# Altium PCB TD2_Project_TX.PcbDoc
Units mil, origin at the board's own origin, x right, y up, seen from the top; angles counter-clockwise.
Board outline 3941.96 x 3941.96 mil, 2 copper layers (Top Layer, Bottom Layer); 93 components, 80 nets, 381 pads, 128 vias.
Unrouted connection lines stored in the file: 3.
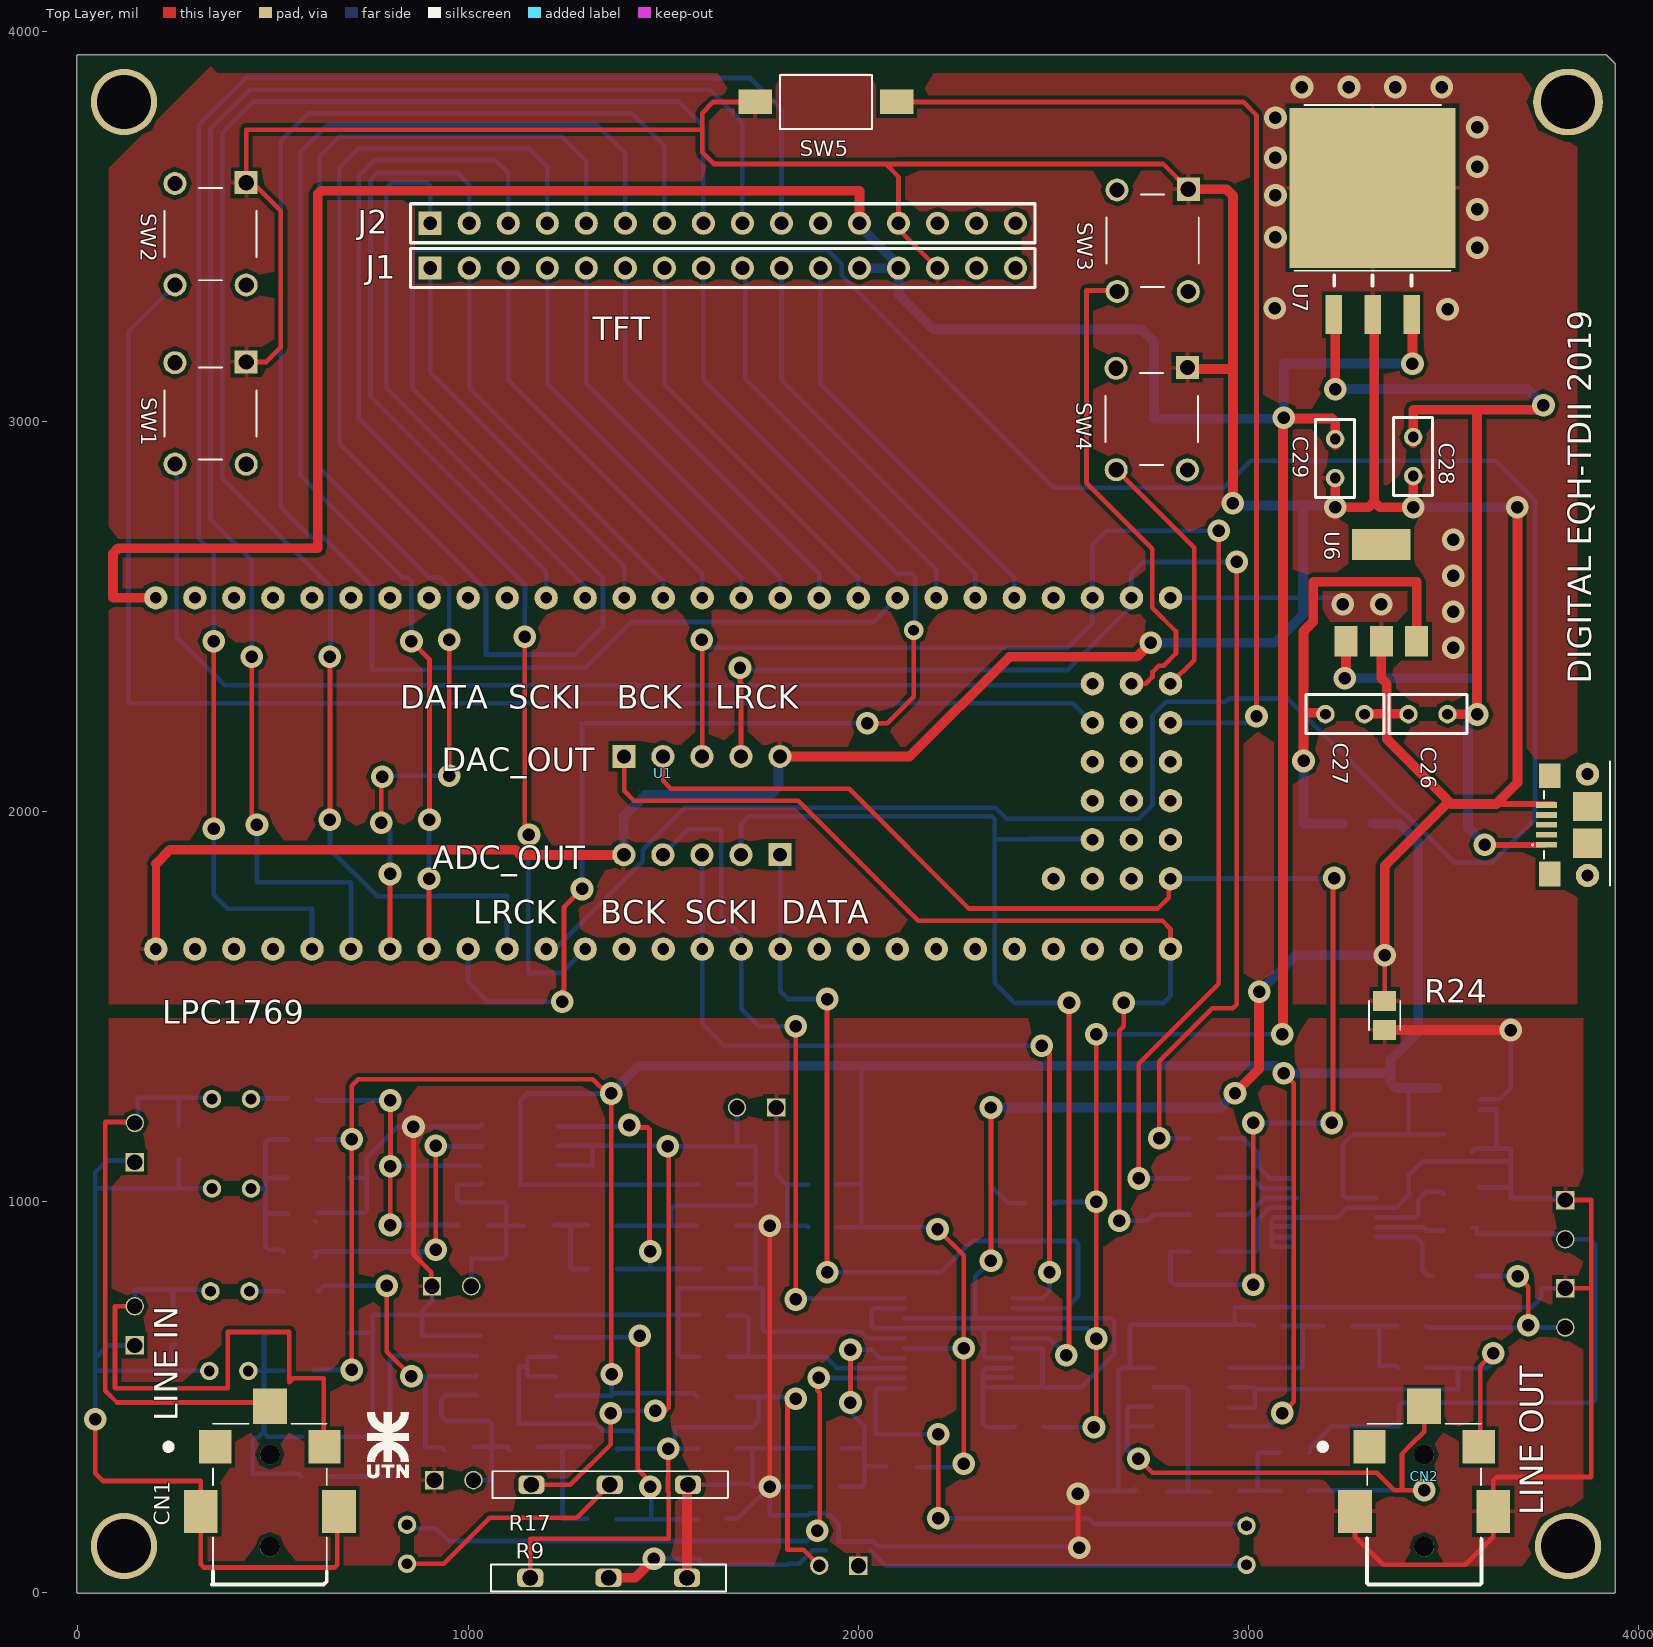
[diagram p0: Top Layer view]
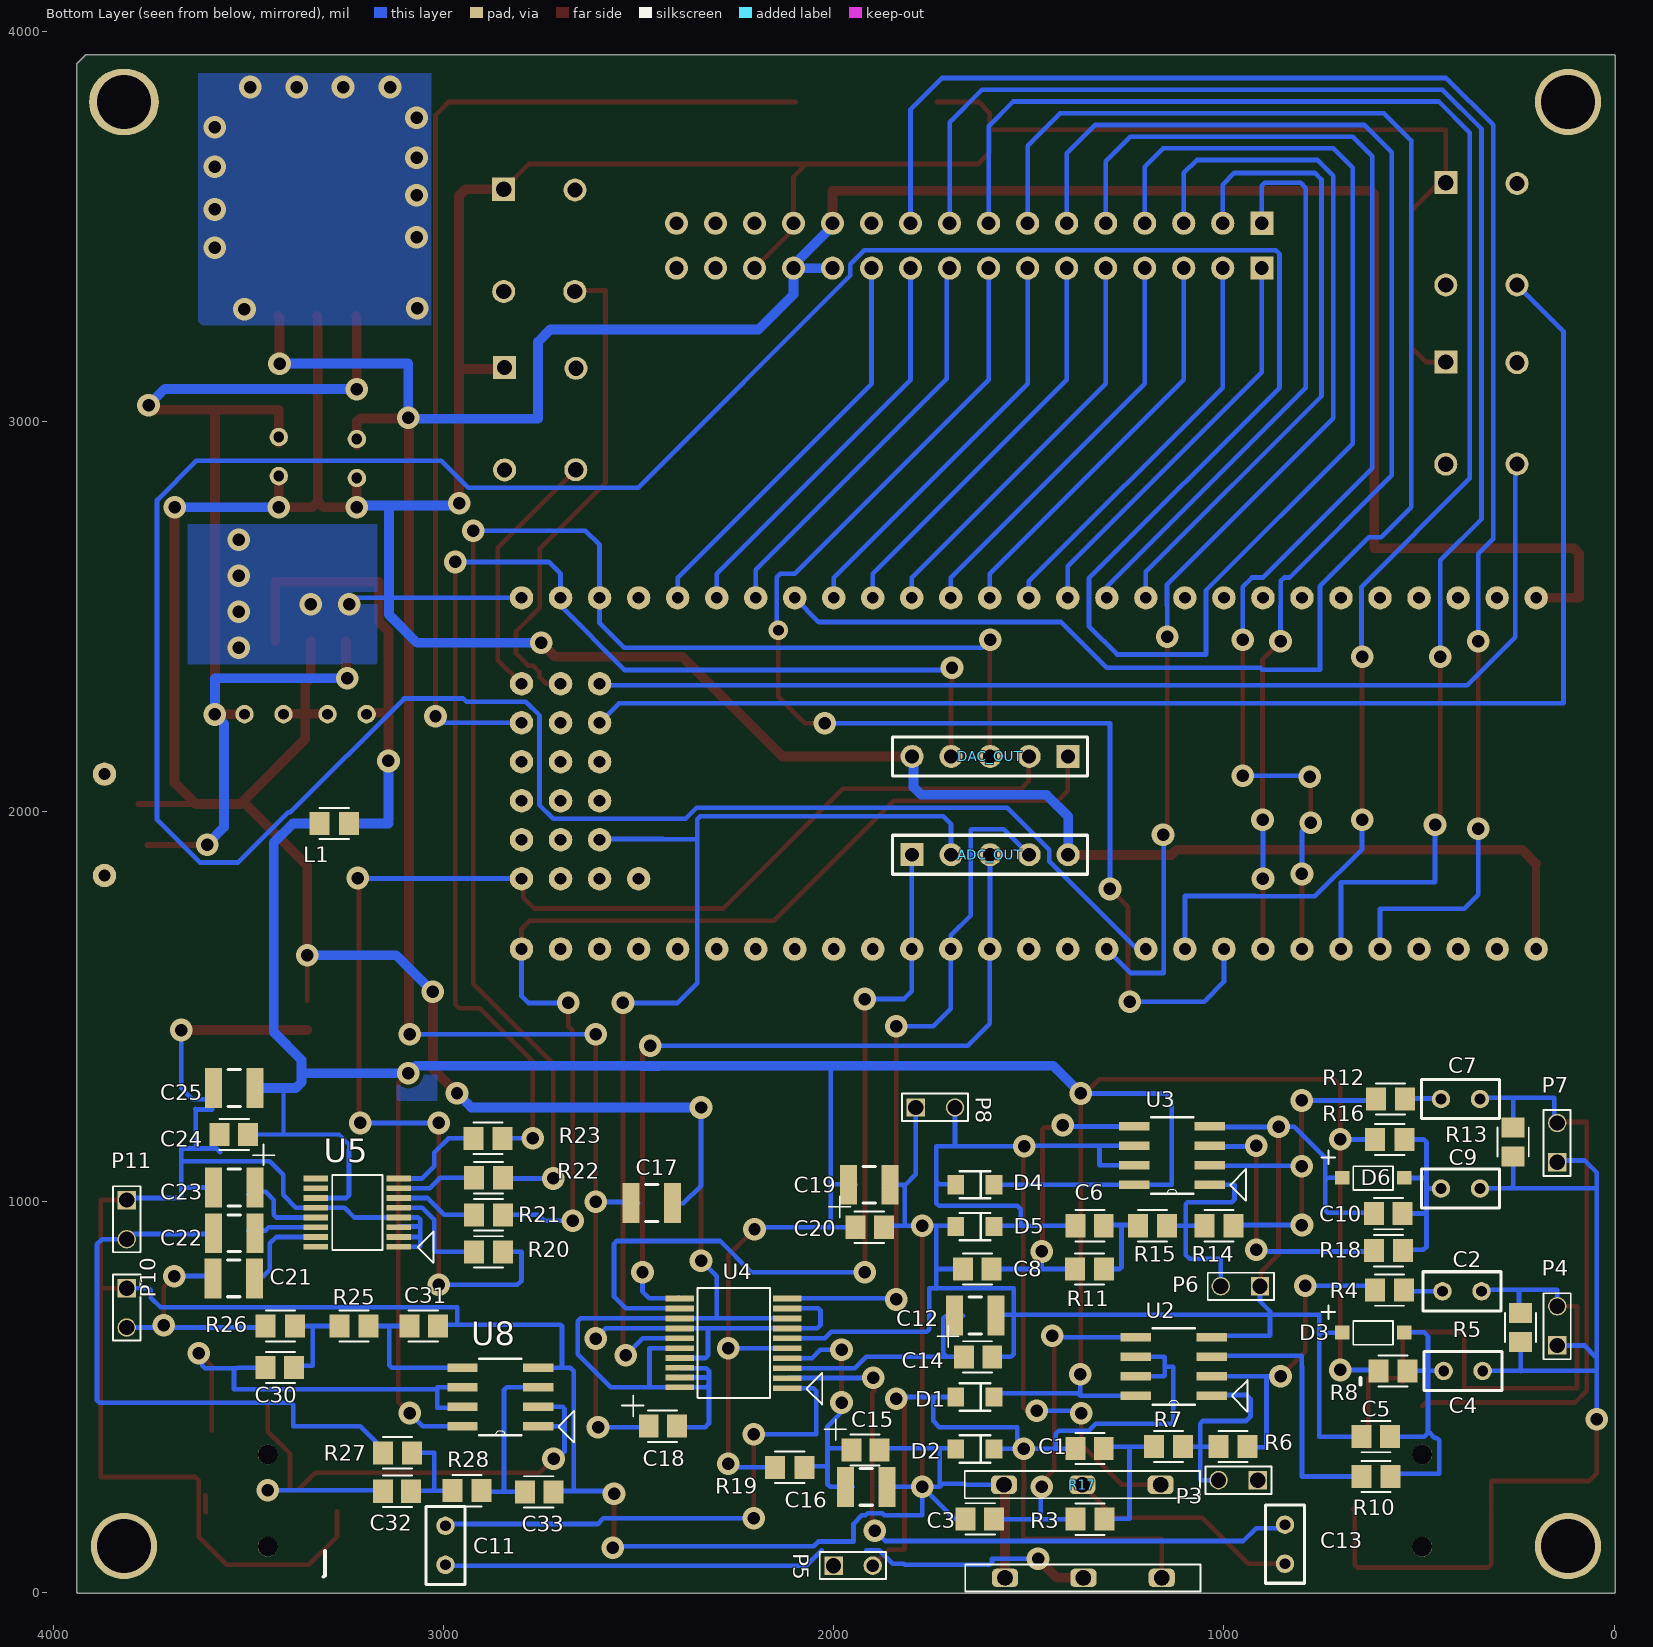
[diagram p1: Bottom Layer view, seen from below]

## Layer stack, top to bottom
Top Solder: solder mask 0.4, Solder Resist, Dk 3.5
Top Layer: signal copper 1.4
Dielectric 1: dielectric 12.6, FR-4, Dk 4.8
Bottom Layer: signal copper 1.4
Bottom Solder: solder mask 0.4, Solder Resist, Dk 3.5

## Board outline
-2.48,0 -2.48,3937.01 cw(c0,3937.01) 0,3939.48 3916.54,3939.48 cw(c3916.54,3937.01) 3918.29,3938.76 3918.28,3938.77 3938.77,3918.28 ccw(c3937.01,3916.54) 3938.75,3918.3 3938.76,3918.29 cw(c3937.01,3916.54) 3939.48,3916.54 3939.48,0 cw(c3937.01,0) 3937.01,-2.48 0,-2.48 cw(c0,0)

## Design rules (kind name [scope] priority, off if disabled: settings)
Clearance [All] p1: gap=10 ignorepadtopadclearanceinfootprint=FALSE
Height [All] p1: minheight=0 maxheight=1259 prefheight=500
PolygonConnect PolygonConnect_1 [All] p1: thpad.connectstyle=Relief thpad.reliefconductorwidth=10 thpad.reliefentries=4 thpad.polygonreliefangle="90 Angle" thpad.airgapwidth=10 smdpad.connectstyle=Relief smdpad.reliefconductorwidth=10 smdpad.reliefentries=4 smdpad.polygonreliefangle="90 Angle" smdpad.airgapwidth=10 via.connectstyle=Direct via.reliefconductorwidth=10 via.reliefentries=4 via.polygonreliefangle="90 Angle" via.airgapwidth=10
PolygonConnect [All] p2: connectstyle=Relief reliefconductorwidth=10 reliefentries=4 polygonreliefangle="90 Angle" airgapwidth=10
RoutingVias [All] p1: holewidth=32 width=58 viastyle="Through Hole" minholewidth=32 minwidth=58 maxholewidth=32 maxwidth=58
SolderMaskExpansion [All] p1: expansion=4
Width Width_1 [All] p1: maxlimit=25 minlimit=10 preferedwidth=12
29 further rules are at their usual default settings.

## Classes and differential pairs
component class U_ADC_PCM1802: ADC C11 C12 C13 C14 C15 C16 C17 C18 C19 C20 R19 U4
component class U_Battery: C26 C27 C28 C29 L1 U6 U7
component class U_DAC_PCM1781: C21 C22 C23 C24 C25 R20 R21 R22 R23 R24 U5
component class U_Input_Conditioning: C1 C2 C3 C4 C5 C6 C7 C8 C9 C10 CN1 D1 D2 D3 D4 D5 D6 P3 P4 P5 P6 P7 P8 R3 R4 R5 R6 R7 R8 R9 R10 R11 R12 R13 R14 R15 R16 R17 R18 U2 U3
component class U_Micro_M3: DAC_OUT SW1 SW2 SW3 SW4 SW5 U1
component class U_SALIDA_DAC: C30 C31 C32 C33 CN2 P10 P11 R25 R26 R27 R28 U8
component class U_TFT: J1 J2

## Components (designator, comment, footprint, x,y, rotation, side; value= is the part's Value field where it differs from the comment)
ADC_OUT "ADC_OUT" HDR1X5 1799.21,1889.76 r180 bottom
C1 "1000p" C_0805 1343,367.9 r0 bottom
C2 "10u" RAD-0.1 389.8,771.02 r180 bottom
C3 "470p" C_0805 1624.37,187.8 r0 bottom
C4 "10u" RAD-0.1 387,567 r0 bottom
C5 "220n" C_0805 610,398.54 r0 bottom
C6 "1000p" C_0805 1343,939 r0 bottom
C7 "10u" RAD-0.1 393.74,1263.52 r180 bottom
C8 "470p" C_0805 1631.1,828.25 r0 bottom
C9 "10u" RAD-0.1 393.74,1034.22 r0 bottom
C10 "220n" C_0805 578,970 r0 bottom
C11 "1uF" RAD-0.1 2995,120 r270 bottom
C12 "10uF" 14-1210 1637.03,708.72 r180 bottom
C13 "1uF" RAD-0.1 843.7,122.83 r270 bottom
C14 "0.1uF" C_0805_POL 1631.1,603 r180 bottom
C15 "0.1uF" C_0805_POL 1920,364 r180 bottom
C16 "10uF" 14-1210 1917,270 r180 bottom
C17 "10uF" 14-1210 2466,997.03 r180 bottom
C18 "0.1uF" C_0805_Pol 2439,425.3 r180 bottom
C19 "10uF" 14-1210 1909,1044 r180 bottom
C20 "0.1uF" C_0805_POL 1909,935.15 r180 bottom
C21 "10-uF Electrolytic" 14-1210 3537.8,804.33 r0 bottom
C22 "10-uF Electrolytic" 14-1210 3536.22,919.69 r0 bottom
C23 "10-uF Electrolytic" 14-1210 3536.22,1037 r0 bottom
C24 "0,1-uF Ceramic" C_0805_POL 3536.22,1173 r0 bottom
C25 "10-uF Electrolytic" 14-1210 3536.22,1292 r0 bottom
C26 "1 µF (X7R)" RAD-0.1 3460,2250 r180 top
C27 "1µF" RAD-0.1 3247,2250 r0 top
C28 "10 µF (X7R)" RAD-0.1 3422,2910 r270 top
C29 "10 µF (X7R)" RAD-0.1 3222,2905 r270 top
C30 "1000p" C_0805 3418.11,575.71 r0 bottom
C31 "470p" C_0805 3051.97,682.01 r180 bottom
C32 "1000p" C_0805 3118.11,258.62 r0 bottom
C33 "470p" C_0805 2755.91,257.05 r180 bottom
CN1 "Jack_3.5mm" JACK_3.5MM 492.13,215 r90 top locked
CN2 "Jack_3.5mm" JACK_3.5MM 3450,215 r90 top
D1 "Diode" LED_0805 1638,500 r180 bottom
D2 "Diode" LED_0805 1638,367.05 r180 bottom
D3 "ZENNER" SOD123 697,665.15 r180 bottom locked
D4 "Diode" LED_0805 1638,1044 r180 bottom
D5 "Diode" LED_0805 1638,936.8 r180 bottom
D6 "ZENNER" SOD123 697,1062 r180 bottom locked
DAC_OUT "DAC_OUT" HDR1X5 1399.21,2141.73 r0 bottom
J1 "CON16" HDR1X16 903,3393 r0 top
J2 "CON16" HDR1X16 903,3508 r0 top
L1 "Inductor" R_0805 3280,1970 r0 bottom
P3 "Header 2" HEADER1X2#1 913.39,287.01 r90 bottom
P4 "Header 2" HEADER1X2#1 145.71,632.2 r180 bottom
P5 "Header 2" HEADER1X2#2 2000.39,68 r270 bottom
P6 "Header 2" HEADER1X2#1 907.61,784 r90 bottom
P7 "Header 2" HEADER1X2#1 146,1102 r180 bottom
P8 "Header 2" HEADER1X2#1 1789.61,1242 r270 bottom
P10 "Header 2" HEADER1X2#1 3811.81,778.46 r0 bottom
P11 "Header 2" HEADER1X2#1 3811.81,1004.84 r0 bottom
R3 "8.2K" R_0805 1343,187.01 r0 bottom
R4 "4.7K" R_0805 576,774 r180 bottom
R5 "10K" R_0805 239.76,678.07 r90 bottom
R6 "15K" R_0805 977,373 r0 bottom
R7 "13K" R_0805 1142,373 r0 bottom
R8 "180" R_0805 567,567 r0 bottom
R9 "POTENCIOMETRO" POTENCIOMETRO 1360.24,36.61 r90 top
R10 "4.7K" R_0805 610,296.18 r0 bottom
R11 "8.2K" R_0805 1344.81,828.25 r0 bottom
R12 "4.7K" R_0805 572.83,1263.52 r180 bottom
R13 "10K" R_0805 258.9,1153.46 r90 bottom
R14 "15K" R_0805 1013,939 r0 bottom
R15 "13K" R_0805 1183,939 r0 bottom
R16 "180" R_0805 575,1160.22 r0 bottom
R17 "POTENCIOMETRO" POTENCIOMETRO 1362.99,275.2 r270 bottom
R18 "4.7K" R_0805 578,875 r0 bottom
R19 "1K 5%" R_0805 2112.54,320 r180 bottom
R20 "100 5%" R_0805 2885,872 r0 bottom
R21 "100 5%" R_0805 2885,967 r0 bottom
R22 "100 5%" R_0805 2884.92,1062 r0 bottom
R23 "100 5%" R_0805 2886,1163 r0 bottom
R24 "1 5%" R_0805 3348.82,1477.95 r90 top
R25 "8.2K" R_0805 3229.13,682.01 r180 bottom
R26 "13K" R_0805 3418.11,682.01 r180 bottom
R27 "13K" R_0805 3118.11,357.05 r180 bottom
R28 "13K" R_0805 2940,260 r180 bottom
SW1 "PULSADOR" PULSADOR 340,3020.76 r270 top
SW2 "PULSADOR" PULSADOR 340,3480 r270 top
SW3 "PULSADOR" PULSADOR 2754.39,3463.25 r270 top
SW4 "PULSADOR" PULSADOR 2751.97,3006.3 r270 top
SW5 "PULSADOR" SW_SMD(2) 1917,3818.9 r0 top
U1 "LPCEXPRESSO1769" LPCEXPRESSO1769 1400,2108 r90 top locked
U2 "OPA2337" SOIC-8N 1128.5,578.44 r0 bottom
U3 "OPA2337" SOIC-8N 1133,1119 r0 bottom
U4 "ADC_PCM1802" "SSOP (20)" 2118.74,522.56 r0 bottom
U5 "DAC_PCM1781" "SSOP (16)" 3114.96,885.15 r0 bottom
U6 "MCP1703" SOT-223-3 3340.35,2560.87 r0 top locked
U7 "MIC29300" TO-263-3 3318.11,3273.82 r0 top
U8 "OPA2337" SOIC-8N 2854.33,500 r0 bottom

## Footprints (in the part's own frame and the unit in brackets; to place one, negate y for a bottom-side part, rotate by r counter-clockwise, add the part's x,y. Pads: shape width x height; smd on the part's side, far side on the other; paste and mask are expansions set on the pad)
14-1210 [mm] "Chip Resistor, Body 3.2x2.5mm, IPC High Density"
  rect 1.1x2.6 smd: 1(-1.35,0) 2(1.35,0)
  silkscreen extent -0.4,-1.2 0.4,1.2, body extent -1.68,-1.32 1.68,1.32, height 0.9
C_0805 [mm] "Capacitor SMD"
  rect 1.3x1.5 smd: 1(-0.889,0) 2(0.95,0)
  silkscreen extent -0.95,-1.02 0.95,1.02, body extent -1,-0.62 1,0.63, height 0.78
C_0805_POL [mm] "CAPACITOR_POLARYSED"
  rect 1.3x1.5 smd: 1(-0.889,0) 2(0.95,0)
  silkscreen extent -2.63,-1.02 0.95,2.02, body extent -1,-0.62 1,0.63, height 0.78
C_0805_Pol [mm] "CAPACITOR_POLARYSED"
  rect 1.3x1.5 smd: 1(-0.889,0) 2(0.95,0)
  silkscreen extent -2.63,-1.02 0.95,2.02, body extent -1,-0.62 1,0.63, height 0.78
HDR1X5 [mm] "Connector; Header; 5 Position"
  rect 1.5x1.5 hole 0.9: 1(0,0)
  round 1.5 hole 0.9: 2(2.54,0) 3(5.08,0) 4(7.62,0) 5(10.16,0)
  silkscreen extent -1.27,-1.27 11.43,1.27
HDR1X16 [mm] "Connector; Header; 16 Position"
  rect 1.5x1.5 hole 0.9: 1(0,0)
  round 1.5 hole 0.9: 2(2.54,0) 3(5.08,0) 4(7.62,0) 5(10.16,0) 6(12.7,0) 7(15.24,0) 8(17.78,0) 9(20.32,0) 10(22.86,0) 11(25.4,0) 12(27.94,0) 13(30.48,0) 14(33.02,0) 15(35.56,0) 16(38.1,0)
  silkscreen extent -1.27,-1.27 39.37,1.27
HEADER1X2#1 [mm]
  rect 1.2x1.2 hole 1: 1(0,0)
  round 1.2 hole 1: 2(0,2.55)
  silkscreen extent -0.9,-0.9 0.88,3.4, body extent -1.27,-1.31 1.27,3.77, height 8.54
HEADER1X2#2 [mm]
  rect 1.2x1.2 hole 1: 1(0,0)
  round 1.2 hole 0.8: 2(0,2.55)
  silkscreen extent -0.9,-0.9 0.88,3.4, body extent -1.27,-1.31 1.27,3.77, height 8.54
JACK_3.5MM [mm] "*CUI_SJ2-35944A-SMT-TR_SJ2-35944A-SMT-TR(Primary)"
  rect 2.2x2.1 smd: 1(4,3.55) 2(4,-3.55)
  rect 2.3x2.2 smd: 3(6.65,0)
  rect 2.8x2.2 smd: 4(-0.2,4.5) 5(-0.2,-4.5)
  round 1.3 hole 1.3 unplated: None(-2.5,0) None(3.5,0)
  silkscreen extent -4.1,-3.7 5.5,6.8, body extent -8.35,-5.11 7.35,4.89, height 6.56
LED_0805 [mm]
  rect 1.1x1.25 smd: 1(-1.25,0) 2(1.25,0)
  silkscreen extent -1,-0.89 1,0.89, body extent -1.02,-0.46 1.04,0.45, height 0.85
LPCEXPRESSO1769 [mil]
  round 60 hole 30: 1(-460,1200) 2(-460,1100) 3(-460,1000) 4(-460,900) 5(-460,800) 6(-460,700) 7(-460,600) 8(-460,500) 9(-460,400) 10(-460,300) 11(-460,200) 12(-460,100) 13(-460,0) 14(-460,-100) 15(-460,-200) 16(-460,-300) 17(-460,-400) 18(-460,-500) 19(-460,-600) 20(-460,-700) 21(-460,-800) 22(-460,-900) 23(-460,-1000) 24(-460,-1100) 25(-460,-1200) 26(-460,-1300) 27(-460,-1400) 28(440,1200) 29(440,1100) 30(440,1000) 31(440,900) 32(440,800) 33(440,700) 34(440,600) 35(440,500) 36(440,400) 37(440,300) 38(440,200) 39(440,100) 40(440,0) 41(440,-100) 42(440,-200) 43(440,-300) 44(440,-400) 45(440,-500) 46(440,-600) 47(440,-700) 48(440,-800) 49(440,-900) 50(440,-1000) 51(440,-1100) 52(440,-1200) 53(440,-1300) 54(440,-1400) 55(-280,-1100) 56(-280,-1200) 57(-180,-1200) 58(-80,-1200) 59(20,-1200) 60(120,-1200) 61(220,-1200) 62(-280,-1300) 63(-180,-1300) 64(-80,-1300) 65(20,-1300) 66(120,-1300) 67(220,-1300) 68(-280,-1400) 69(-180,-1400) 70(-80,-1400) 71(20,-1400) 72(120,-1400) 73(220,-1400)
  body extent -737,-1484 613,2597, height 706
POTENCIOMETRO [mm]
  rrect50% 1.2x1.7 hole 1: 1(0,-5.1) 2(0,0) 3(0,5.1)
  silkscreen extent -0.9,-7.65 0.88,7.65
PULSADOR [mm] "TE_3-1825910-1"
  rect 1.498x1.498 hole 0.99: 1(-3.35,2.32)
  round 1.498 hole 0.99: 2(3.3,-2.31) 3(-3.3,-2.32) 4(3.31,2.32)
  silkscreen extent -3,-3 3,3, body extent -3.9,-2.99 3.9,3, height 17.5
R_0805 [mm] "Resistor SMD"
  rect 1.3x1.5 smd: 1(-0.95,0) 2(0.95,0)
  silkscreen extent -0.95,-1.02 0.95,1.02, body extent -1.05,-0.63 0.95,0.62, height 0.78
RAD-0.1 [mm] "Radial Cap, Thru-Hole; 2 Leads; 0.1 in Pin Spacing"
  round 1.2 hole 0.7: 1(-1.27,0) 2(1.27,0)
  silkscreen extent -2.54,-1.27 2.54,1.27
SOD123 [mm]
  rect 0.95x0.9 smd: 1(0,0) 2(4.05,0)
  silkscreen extent -1.34,-0.79 3.32,1.78
SOIC-8N [mil] "LM358"
  rect 78x22 smd: 1(-97,75) 2(-97,25) 3(-97,-25) 4(-97,-75) 5(97,-75) 6(97,-25) 7(97,25) 8(97,75)
  silkscreen extent -189,-98 54,116, body extent -119,-96 118,97, height 64
SOT-223-3 [mm] "MCP1703 / LM1117"
  rect 1.5x2 smd: 1(-2.3,-3.15) 2(0,-3.15) 3(2.3,-3.15)
  rect 3.8x2 smd: 4(0,3.15)
  body extent -3.23,-3.62 3.27,3.38, height 1.68
"SSOP (16)" [mm] "DAC_PCM1781"
  rect 1.6x0.381 smd: 1(0,0) 2(0,-0.635) 3(0,-1.27) 4(0,-1.905) 5(0,-2.54) 6(0,-3.175) 7(0,-3.81) 8(0,-4.445) 9(5.4,-4.445) 10(5.4,-3.81) 11(5.4,-3.175) 12(5.4,-2.54) 13(5.4,-1.905) 14(5.4,-1.27) 15(5.4,-0.635) 16(5.4,0)
  silkscreen extent -2.27,-4.66 4.32,1.05, body extent -0.4,-4.67 5.62,0.23, height 1.62
"SSOP (20)" [mm] "ADC_PCM1802"
  rect 1.85x0.381 smd: 1(0,0) 1(0,0) 2(0,-0.65) 3(0,-1.3) 4(0,-1.95) 5(0,-2.6) 6(0,-3.25) 7(0,-3.9) 8(0,-4.55) 9(0,-5.2) 10(0,-5.85) 11(7,-5.85) 12(7,-5.2) 13(7,-4.55) 14(7,-3.9) 15(7,-3.25) 16(7,-2.6) 17(7,-1.965) 18(7,-1.33) 19(7,-0.695) 20(7,-0.06)
  silkscreen extent -2.27,-6.53 5.84,1.05, body extent -0.44,-6.55 7.36,0.65, height 1.9
SW_SMD(2) [mm] "SW_1437566-3"
  rect 2.18x1.6 smd: 1(-4.6,0) 2(4.6,0)
  silkscreen extent -3,-1.75 3,1.75, body extent -5.08,-1.7 4.88,1.8, height 4.4
TO-263-3 [mil] "MIC29300"
  rect 42x100 smd: 1(-100,0) 2(0,0) 3(100,0)
  rect 425x410 smd: GND(0,325)
  silkscreen extent -200,75 200,538, body extent -211,-18 209,547

## Part data
ADC_OUT DAC_OUT: library part "Header 5", "Header, 5-Pin", LatestRevisionDate=17-Jul-2002, LatestRevisionNote="Re-released for DXP Platform.", Publisher="Altium Limited"
C1 C2 C3 C4 C5 C6 C7 C8 C9 C10 C30 C31 C32 C33: library part Capacitor_NP, "Non Polarised Capacitor"
C11 C12 C13 C14 C15 C16 C17 C18 C19 C20 C21 C22 C23 C24 C25 C26 C27 C28 C29: library part Capacitor_Pol, "Polarysed Capacitor"
P3 P4 P5 P6 P7 P8 P10 P11: "Header, 2-Pin", LatestRevisionDate=17-Jul-2002, LatestRevisionNote="Re-released for DXP Platform.", Publisher="Altium Limited"
R3 R4 R5 R6 R7 R8 R10 R11 R12 R13 R14 R15 R16 R18 R19 R20 R21 R22 R23 R24 R25 R26 R27 R28: library part Resistor
U4: "The PCM1802 is a high-performance, low-cost, / single-chip stereo analog-to-digital converter with / single-ended analog voltage input. The PCM1802 / uses a delta-sigma modulator with 64-times or / 128-times oversampling, and includes a digital / decimation filter and high-pass filter (HPF), which / removes the DC component of the input signal. For / various applications, the PCM1802 supports master / and slave modes and four data formats in serial / interface. The PCM1802 is suitable for a wide variety / of cost-sensitive consumer applications where good / performance, 5-V analog supply, and 3.3-V digital / supply operation is required. The PCM1802 is / fabricated using a highly advanced CMOS process / and is available in the DB 20-pin SSOP package."
U5: "The PCM1780/81/82 is a CMOS, monolithic, integrated circuit, which includes stereo digital-to-analog converters and support circuitry in a small 16-lead SSOP package. The data converters use TI’s enhanced multilevel delta-sigma architecture to achieve excellent dynamic performance an improved tolerance to clock jitter. Sampling rates up to 200 kHz are supported."
U6 U7: "low dropout positive voltage regulators that / are capable of providing an output current that is in excess of 1.0 A / with a maximum dropout voltage of 1.2 V at 800 mA over / temperature. This series contains nine fixed output voltages of 1.5 V, / 1.8 V, 1.9 V, 2.0 V, 2.5 V, 2.85 V, 3.3 V, 5.0 V, and 12 V that have no / minimum load requirement to maintain regulation"

## Free pads (board coordinates)
  rect 53.15x15 smd: 1(3763.7,1915.24) 2(3763.7,1940.83) 3(3763.7,1966.42) 4(3763.7,1992.01) 5(3763.7,2017.6)
  rect 55.12x62.99 smd: 6(3772.56,2092.4) 7(3772.56,1840.43)
  rect 74.8x74.8 smd: 8(3869.02,1919.17) 9(3869.02,2013.66)
  round 60 hole 31.5: none(3868.7,1836.42) none(3868.7,2096.42)
  round 170 hole 137.8 unplated: ""(118.11,118.11) ""(118.11,3818.9) ""(3818.9,118.11)
  oval 179x170 hole 137.8 unplated: ""(3818.9,3818.9)

## Via types
v1: diameter 58, hole 32, Top Layer to Bottom Layer, tented both sides, 105 vias
v2: diameter 58, hole 32, Top Layer to Bottom Layer, 22 vias
v3: diameter 50, hole 28, Top Layer to Bottom Layer, 1 vias

## Nets (pads, with @x,y where several pads share a name; then routed paths per layer and width w, separated by ;. In a path a pad name is that pad's centre, name@x,y a point inside that pad or via, vN(x,y) a via of type N, cw(c..) or ccw(c..) an arc to the next point about the centre after c; other vN are vias at no path point)
3V3: C17.1 C18.1 C29.1 J1.12 J1.13 J2.12 U1.28 U4.7 U4.9 U4.14 U4.17 U7.3 | length 9661
  Top Layer w12: J1.13 J1.13@2103,3400.5 ; v1(2604,423) 2610,429 v1(2610,650) v1(2610,1000) v1(2610,1430) ; 3083.76,2230 3088.4,2234.65
  Top Layer w25: 90.16,2548.03 90.16,2661.81 103.54,2675.2 614.96,2675.2 614.96,3583.07 623.38,3591.49 2003,3591.49 J2.12 J2.12@2003,3500.5 ; 90.19,2548 U1.28 ; J1.13 J1.13@2104.06,3391.94 ; v1(3086.81,1430) 3088.4,1431.6 3088.4,2234.65 3088.4,3008.4 v1(3090,3010) 3092.05,3007.95 3214.05,3007.95 3222,3000 C29.1 C29.1@3222,2940 ; v1(3420.08,3148.43) 3420.08,3266.34 U7.3@3424.02,3270.28
  Bottom Layer w12: U4.9 2039.69,727.28 2034,721.6 2034,684 2041.9,676.1 U4.7 2319.72,676.1 ; U4.17 2329.03,599.92 2322,606.95 2322,673.82 2319.72,676.1 ; C18.1 2476.3,423 v1@2586,423 ; C17.1@2501,997.03 2502.97,999 2505.94,996.03 2509.91,1000 v1(2610,1000) ; v1(2610,650) 2583.9,676.1 U4.14 2319.72,676.1 ; v1(2610,1430) v1(3086.81,1430)
  Bottom Layer w25: J1.12 J1.13 ; J2.12 2003,3500.5 2103,3400.5 J1.13 ; v1(3420.08,3148.43) 3090,3148.43 v1(3090,3010) 3087.09,3007.09 2757.68,3007.09 2757.68,3204.13 2726.38,3235.43 2192.91,3235.43 2103,3325.35 J1.13
5V_ANALOG: C19.1 C20.1 C24.1 C25.1 D1.2 D4.2 L1.2 R8.2 R16.2 R19.1 U2.8 U3.8 U4.5 U5.11 U8.8 | length 9917.1
  Top Layer w12: v1(702,569.43) v1(702,1160.22) 702,1297.97 718.03,1314 1320,1314 1356,1278 v1(1366.5,1278) 1367.25,1277.25 1367.25,558.75 v1(1368,558) ; v1(2203,930) 2270,863 v1(2270,625) v1(2270,329) ; v1@3087,441 3087,458.85 v1(3086.81,459.04) 3115.86,488.09 3115.86,1304.14 v1(3090,1330)
  Bottom Layer w10: 3242,1133.97 3241.69,1134.29 3241.69,1147.66 3267.03,1173 3410,1173 ; 3410,1292 3410,1173 ; C24.1 3410,1173
  Bottom Layer w12: R8.2 606.83,569.43 v1(702,569.43) ; R16.2 v1(702,1160.22) ; U2.8 1368,503.44 ; v1(1366.5,1278) 1152,1278 1134,1260 1134,1044 U3.8 D4.2 ; v1(1368,558) 1368,503.44 ; D1.2 1578.79,510 1374.56,510 1368,503.44 ; C20.1 2000.84,935.15 ; C19.1@1944,1044 1945,1045 2006.87,1045 2007.87,1044 ; 2007.87,1343.7 2007.87,1044 ; U4.5 2118.78,624.96 v1(2270,625) v1(2270,625) ; R19.1 2270,320 v1(2270,329) ; v1(2203,930) 2197.85,935.15 2000.84,935.15 ; U8.8 3052.77,425 v1(3086.81,459.04) ; 3242,1133.97 3242,1017.18 3249.03,1010.15 U5.11 ; 2000.84,935.15 2007.87,942.18 2007.87,1044
  Bottom Layer w25: v1(1366.5,1278) 1437.71,1349.21 2447.96,1349.21 2448.67,1348.5 2491.33,1348.5 2492.04,1349.21 3070.79,1349.21 v1(3090,1330) 3364,1330 ; L1.2 3386,1970 3435,1921 3435,1435 3364,1364 3364,1330 ; C25.1 3410,1292 3378.64,1292 3364,1306.64 3364,1330
5V_DIGITAL: C27.1 L1.1 U6.3 | length 1191.1
  Top Layer w25: v1(3141,2130) 3141,2462.45 3165.95,2487.4 3165.95,2589.18 3430.9,2589.18 U6.3 ; 3151,2253.78 C27.1@3203.73,2253.78
  Bottom Layer w25: 3141,1970 L1.1 ; 3141,1980 v1(3141,2130)
+IN_B: C31.1 R25.2 U8.5 | length 395.8
  Bottom Layer w12: U8.5 2951.41,574.92 3132.32,574.92 3139.35,581.95 3139.35,682.01 ; C31.1 3139.35,682.01 ; R25.2 3139.35,682.01
+IN_B1: C3.1 R3.2 U2.5 | length 911.9
  Top Layer w12: v1(1440,657) 1434.53,651.53 1434.53,314.92 1467,282.45 v1(1467,270)
  Bottom Layer w12: U2.5 1436.44,653.44 v1(1440,657) ; R3.2 1469.29,187.01 ; v1(1467,270) 1469.29,267.71 1469.29,187.01 ; C3.1 1588.58,187.01 1469.29,187.01
+IN_B2: C8.1 R11.2 U3.5 | length 813.6
  Top Layer w12: v1(1413,1197) 1419.12,1190.88 1460,1190.88 1465,1185.88 1465,875 v1(1467,873)
  Bottom Layer w12: U3.5 1230.51,1193.49 1409.49,1193.49 v1(1413,1197) ; R11.2 1467,828.25 ; v1(1467,873) 1467,828.25 ; C8.1 1467,828.25
AGND: C3.2 C5.2 C8.2 C10.2 C12.2 C14.2 C15.2 C16.2 C19.2 C20.2 C23.2 C24.2 C25.2 C31.2 C33.2 CN2.4 CN2.5 D2.1 D3.1 D5.1 D6.1 P3.1 P5.1 P6.1 P8.1 P10.1 P11.1 R9.1 R17.1 R24.1 U2.4 U3.4 U4.6 U5.1 U5.2 U5.3 U5.4 U5.12 U8.4 | length 12920.5
  Top Layer w12: v1(860,1192.91) 860,865.6 906,819.6 P6.1@906,787 ; v1(1773,270) v1(1773,939) ; v1@2559.06,248.12 v1(2562.94,252) 2562.94,117.77 v1(2566.54,114.17) ; CN2.4 3272.83,142.17 3345,70 3555,70 3627.17,142.17 CN2.5 3627.17,286.17 3636,295 3877.95,295 3877.95,1004.84 P11.1 ; CN2.5@3610,205 CN2.5@3610,247.83 ; P10.1 3877.95,778.46
  Top Layer w25: R9.1 1561.02,272.44 R17.1 ; R24.1 v1(3672,1440.55)
  Bottom Layer w8: C33.2@2710.55,265 C33.2
  Bottom Layer w12: C10.2@606.4,952 C10.2@609.4,949 ; C10.2 617.4,972 733.7,972 740.73,979.03 740.73,1054.97 ; C5.2 756,398.54 756,665.15 ; D3.1 756,665.15 ; D6.1 733.7,1062 740.73,1054.97 ; v1@852.84,1185.76 v1(860,1192.91) 820.16,1192.91 740.73,1113.49 740.73,1054.97 ; v1@861,1192 1025,1192 1027,1190 U3.4@1036,1199 ; P6.1 907.61,745.61 881.91,719.91 881.91,711 ; U2.4@1032,656.71 881.91,656.71 881.91,711 ; R17.1 1662.31,275.2 1664.67,277.56 1720.44,277.56 1728,270 ; C14.2 1546.03,603 1539,610.03 1539,711 ; C12.2@1593.7,711 1539,711 ; C3.2 1690.8,187.8 v1(1773,270) ; C8.2 1737,828.25 ; D5.1 1689.42,939 1737,939 ; D2.1@1688.19,367.05 1690.14,369 1728,369 ; 1737,778.05 1737,939 ; P8.1 1789.61,1070.39 1816,1044 1825.03,1044 ; C20.2 1867.75,939 1818,939 ; C19.2@1871.6,1044 1825.03,1044 ; C16.2@1879.6,270 v1(1773,270) ; C15.2@1886.6,369 1728,369 ; 1949.13,129.62 2039.76,129.62 2051.66,117.72 2562.99,117.72 v1(2566.54,114.17) ; 1949.13,134.93 1949.13,175.51 1927.79,196.85 1918.75,196.85 1913.12,202.48 1875.84,202.48 1870.21,196.85 1773,196.85 v1(1773,270) ; U4.6 2022.89,650.51 2006.4,667 1762.03,667 1755,674.03 1755,778.46 1539,778.46 1539,711 ; v1(2562.94,252) 2569.94,259 2666,259 ; C33.2@2710.55,265 2704.55,259 2666,259 ; U8.4 2696.46,575 ; C31.2 3011.57,685 2965,685 ; U5.1 3061.87,885.15 3059.84,887.18 3059.84,912 ; U5.2 3061.69,910.15 3059.84,912 ; U5.3 3113.11,937 3059.84,937 ; 3572.4,1127 3582.4,1137 3635,1137 ; C23.2 3672,1037 ; 3592.4,1237 3635,1237 ; C25.2@3594.09,1263.39 3643.39,1263.39 3672,1292 v1(3672,1440.55) ; 3636,1238 3635,1237 ; P10.1 3754.69,778.46 3750,773.78 3750,754.69 3725.23,729.92 2965,729.92 2965,685 ; P11.1 3806.65,1010 3672,1010 3672,1037 ; 756,665.15 756,711 881.91,711 ; 881.91,711 1539,711 ; 1728,270 v1(1773,270) ; 1728,270 1728,369 ; 1737,939 v1(1773,939) 1818,939 ; 1818,939 1818,1036.97 1825.03,1044 ; 2666,259 2666,565.68 2675.32,575 2696.46,575 ; 2696.46,575 2696.46,682.28 2699.17,685 2965,685 ; 3059.84,912 3059.84,937 ; 3059.84,937 3059.84,955.46 3064.53,960.15 U5.4 3228.18,960.15 3253.18,985.15 U5.12 3378.15,985.15 3411,1018 3411,1069.81 3445.52,1104.33 3671.33,1104.33 3672,1105 ; 3635,1137 3635,1237 ; 3635,1137 3672,1137 3672,1105 ; 3672,1037 3672,1105
DAC_LOUT: C21.2 P10.2 R26.1 | length 595.1
  Top Layer w12: v1(3690,810) 3717,783 v1(3717,684)
  Bottom Layer w12: R26.1 3459.45,678.07 3605,678.07 ; C21.2@3585.04,810 v1(3690,810) ; 3610,678.07 P10.2
DAC_ROUT: C22.2 P11.2 R27.1 | length 1559.2
  Bottom Layer w12: R27.1 R27.1@3158.46,360 ; R27.1@3158.46,370 3213.76,425.3 3385,425.3 3385,480.31 3389.69,485 3880.97,485 3888,492.03 3888,891 3874.55,904.45 P11.2 3798.54,917.72 3585.25,917.72 C22.2@3585.25,934.3 ; C22.2@3573.1,934.3 C22.2@3585.25,934.3 ; C22.2@3586.1,935.15 C22.2@3585.25,934.3
DB0: J2.3 U1.12 | length 2939
  Top Layer w12: v2(1145.6,2448) 1145.6,1951.23 v2(1156,1940.83)
  Bottom Layer w12: J2.3 1103,3637 1070,3670 760,3670 720,3630 720,3008 1146,2582 1146,2528.54 1145.6,2528.14 v2(1145.6,2448) ; v2(1156,1940.83) 1154,1938.83 1154,1586.45 1238.45,1586.45 U1.12
DB1: J1.4 U1.43 | length 1050.9
  Bottom Layer w12: J1.4 1203,3097 1700,2600 U1.43
DB2: J2.4 U1.11 | length 10839.9
  Bottom Layer w12: U1.11 1221.83,1648 1447.3,1873.47 1447.3,1902.24 1555.25,2010.19 2351.63,2010.19 2379.82,1982 2719.05,1982 2754,2016.95 2754,2247.05 2788.95,2282 2941.07,2282 2948.96,2289.88 3101.08,2289.88 3392.47,1998.5 3397.81,1998.5 3526.34,1869.96 3624.15,1869.96 3734,1979.81 3734,2798.64 3633.02,2899.62 3005.98,2899.62 2936.86,2830.5 2501.12,2830.5 1957.47,3374.14 1957.47,3402.91 1921.86,3438.53 866.85,3438.53 857.47,3429.15 857.47,3086.53 1346,2598 1346,2475.09 1273.91,2403 1046,2403 1046,2567.05 670,2943.05 670,3650 720,3700 1155.97,3700 1203,3652.97 J2.4
DB3: J1.5 U1.44 | length 1050.9
  Bottom Layer w12: J1.5 1303,3097 1800,2600 U1.44
DB4: J2.5 U1.7 | length 3282.9
  Top Layer w12: v2(777.67,1972) 777.67,2103.67 780.4,2100.95 v2(780.4,2089.85) ; U1.7 v2(800,1840.43) ; v2(952,2092.4) v2(952,2440.94)
  Bottom Layer w12: v2(777.67,1972) 800,1949.67 v2(800,1840.43) ; v2(780.4,2089.85) 782.95,2092.4 v2(952,2092.4) ; v2(952,2440.94) 952,2576.1 928.1,2600 900,2600 620,2880 620,3680 670,3730 1240,3730 1303,3667 J2.5
DB5: J1.6 U1.45 | length 1050.9
  Bottom Layer w12: J1.6 1403,3107 1900,2610 U1.45
DB6: J2.6 U1.8 | length 3267.7
  Top Layer w12: v2(855,2437.09) 901,2391.09 v2(901,1979.42) ; U1.8 v2(900,1828)
  Bottom Layer w12: v2(855,2437.09) 855,2526.95 854,2527.95 854,2591.5 845.5,2600 832,2600 570,2862 570,3690 640,3760 1330,3760 1403,3687 J2.6 ; v2(900,1828) 900,1973.45 894.03,1979.42 v2(901,1979.42)
DB7: J1.7 U1.46 | length 1050.9
  Bottom Layer w12: J1.7 1503,3097 2000,2600 U1.46
DB8: J2.7 U1.47 | length 4139
  Bottom Layer w12: J2.7 1503,3707 1420,3790 590,3790 520,3720 520,2780 597,2703 629,2703 754,2578 754,2364.16 901.57,2364.16 906.33,2368.91 1299.89,2368.91 1416.92,2485.94 2037.94,2485.94 U1.47
DB9: J1.8 U1.9 | length 3322.7
  Top Layer w12: v2(1241,1513) 1247.02,1513 1230.51,1529.51 1246,1545 1246,1756 v2(1292,1802) ; v2(2023,2227) 2074,2227 2142,2295 v3(2142,2465)
  Bottom Layer w12: U1.9 1000,1564 1051,1513 v2(1241,1513) ; v2(1292,1802) 1292,2227 v2(2023,2227) ; J1.8 1603,3107 2100,2610 2136.62,2610 2146,2600.62 2146,2483.41 2142,2479.41 v3(2142,2465)
DB10: J2.8 U1.10 | length 4134
  Top Layer w12: v2(646,1979.42) v2(646,2397)
  Bottom Layer w12: v2(646,1979.42) 646,1904.11 767.11,1783 918.64,1783 919.64,1784 1100,1784 U1.10 ; v2(646,2397) 647.4,2397 647.4,2576.6 370,2854 370,3740 450,3820 1540,3820 1603,3757 J2.8
DB11: J1.9 U1.48 | length 1050.9
  Bottom Layer w12: J1.9 1710.67,3385.33 1710.67,3109.33 2200,2620 U1.48
DB12: J2.9 U1.6 | length 4090.1
  Top Layer w12: v2(446,2397) 446,1979.42 v2(459,1966.42)
  Bottom Layer w12: v2(446,2397) 446,2448 446,2494.43 446,2644 340,2750 340,3750 440,3850 1620,3850 1703,3767 J2.9 ; v2(459,1966.42) 459,1819 700,1819 U1.6
DB13: J1.10 U1.49 | length 1050.9
  Bottom Layer w12: J1.10 1803,3107 2300,2610 U1.49
DB14: J2.10 U1.5 | length 4226.2
  Top Layer w12: v2(348.16,1956.71) v2(348.16,2437.09)
  Bottom Layer w12: v2(348.16,1956.71) 348.16,1787.35 384.5,1751 600,1751 U1.5 ; v2(348.16,2437.09) 348.16,2660.84 310,2699 310,3760 430,3880 1723,3880 1803,3800 J2.10
DB15: J1.11 U1.50 | length 1050.9
  Bottom Layer w12: J1.11 1903,3097 2400,2600 U1.50
DGND: ADC_OUT.5 C17.2 C18.2 C26.2 C27.2 C28.2 C29.2 DAC_OUT.5 J1.14 J2.13 pad.5 R24.2 SW1.1 SW2.1 SW3.1 SW4.1 SW5.1 U1.1 U1.54 U4.8 U4.13 U4.16 U4.18 U4.19 U4.20 U6.2 U7.2 U7.GND | length 16334.4
  Top Layer w12: U1.1@209.11,1626 U1.1@215.56,1632.44 ; SW1.1 482.65,3152.65 520,3190 520,3540 448.11,3611.89 SW2.1 431.34,3747.87 1598.98,3747.87 1600,3746.85 ; SW5.1 1628.9,3818.9 1600,3790 1600,3746.85 ; J1.14@2202.8,3392.8 J1.14 2103,3493 J2.13 2103,3627 2070,3660 ; v1(2340,849) v1(2340,1242) ; SW3.1 2780.87,3660 2070,3660 ; R24.2 3349,1515.54 v1(3349,1632) ; 3634.65,2020 3634.96,2019.68 ; 1600,3746.85 1600,3690 1630,3660 2070,3660
  Top Layer w15: 3634.96,2019.68 pad.5@3782,2019.68
  Top Layer w20: U1.1 200,1866.54
  Top Layer w25: 200,1866.54 236.27,1902.8 1121.19,1902.8 1134.67,1889.33 1398.78,1889.33 ADC_OUT.5 ; DAC_OUT.5@1800,2141.73 1800.23,2141.5 2131.5,2141.5 2387,2397 2713.54,2397 v1(2749.21,2432.68) ; SW4.1@2845.73,3134.65 2955.35,3134.65 2960,3130 ; SW3.1 2943.39,3595.14 2960,3578.53 2960,3130 ; v1(2960,2790) 2960,3130 ; v1(2965.35,1278.74) 3027.17,1340.55 v1(3027.17,1538.19) ; C29.2 v1(3222,2780) 3307.36,2780 3322,2794.64 ; C27.2@3291.96,2250.83 3354.33,2250.83 ; U7.2@3324.02,3270.28 3322,3268.26 3322,2794.64 ; U6.2 3340.35,2341.98 3354.33,2328 3354.33,2250.83 ; v1(3349,1632) 3349,1861.24 3513.88,2026.12 3520,2020 3634.65,2020 3689,2074.35 v1(3689,2780) ; C26.2 3409.17,2250.83 3354.33,2250.83 ; C28.2 v1(3422,2780) 3336.64,2780 3322,2794.64 ; 3507.01,2032.99 3354.33,2185.67 3354.33,2250.83
  Bottom Layer w12: U4.8 2300,701.69 ; v1(2340,849) 2300,809 2300,701.69 ; v1(2340,1242) 2340,1042.04 2385.01,997.03 C17.2@2428.6,997.03 ; U4.19 2320.31,549.92 2319.72,549.33 ; U4.18 2393.15,573.74 2326.75,573.74 2319.72,566.71 2319.72,549.33 ; U4.16 2471.87,624.92 2471.87,526.8 2470,524.92 ; C18.2 2399.3,423 2329.03,423 2319.72,432.31 2319.72,531.95 ; U1.54 3139.37,2548 3225.34,2548 v1(3241.69,2531.65) ; 2300,701.69 U4.13 2648.31,701.69 2655.91,694.09 2655.91,609.91 2570.92,524.92 2470,524.92 ; 2319.72,531.95 2319.72,549.33 ; 2319.72,531.95 2326.75,524.92 U4.20 2470,524.92
  Bottom Layer w25: ADC_OUT.5 1399.21,1988.34 1454.18,2043.31 1775.59,2043.31 1795.28,2062.99 1795.28,2137.01 DAC_OUT.5@1800,2141.73 ; v1(2340,1242) 2928.61,1242 v1(2965.35,1278.74) ; v1(2749.21,2432.68) 3067.32,2432.68 3139.37,2504.72 3139.37,2548 3139.37,2782.24 3136.61,2785 ; v1(2960,2790) 2965,2785 3136.61,2785 ; v1(3027.17,1538.19) 3120.98,1632 v1(3349,1632) ; v1(3222,2780) 3217,2785 3136.61,2785 ; v1(3422,2780) v1(3689,2780)
  other v1: 3524.39,2420.17 3524.39,2512.39 3340.11,2531.65 3524.39,2604.62 3524.39,2696.85 3510,3287.4 3067.66,3290.59 3585.85,3444.8 3069,3472.43 3585.85,3543.31 3069,3579.93 3585.85,3652.66 3069,3675.93 3585.85,3754.02 3069,3777.93 3137,3857.09 3257.45,3857.09 3376.25,3857.09 3495.05,3857.09
GND_IN: C4.1 C9.1 CN1.4 CN1.5 P4.1 P7.1 R5.1 R13.1 | length 2771.7
  Top Layer w12: v1(45,443) 45,304.14 64.14,285 314.96,285 CN1.4@314.96,212.52 ; CN1.4 314.96,72.04 324,63 657,63 664.69,70.69 664.69,207.91 669.29,212.52 CN1.5@664.69,217.12
  Bottom Layer w12: v1(45,443) 45,567 ; P4.1 77.13,632.2 47.92,603 45,603 ; P7.1@145.71,1106.22 75.78,1106.22 45,1075.44 45,1035 ; 229.13,567.79 239.76,567.79 ; R5.1@239.76,635.04 249.21,635.04 239.76,625.59 239.76,567.79 ; R13.1@258.9,1111.06 258.9,1041.1 265,1035 ; C4.1@342,567.79 239.76,567.79 ; C9.1@358.74,1034.22 357.96,1035 265,1035 ; 45,567 239.69,567 239.76,566.93 239.76,567.79 ; 45,567 45,603 ; 45,603 45,1035 ; 45,1035 265,1035
L_AUDIO_ADC: C11.2 R9.2 | length 1602
  Top Layer w25: R9.2 1427.56,36.61 v1(1476.38,85.43)
  Bottom Layer w12: v1(1476.38,85.43) 1594.2,85.43 1594.2,76.24 1600.43,70 1818.19,70 1821.03,72.83 1848.8,72.83 1883.59,107.62 1916.41,107.62 ; 2030.64,107.62 2070.27,68 2997,68 C11.2 C11.2@2995,82.6
L_AUDIO_IN: C2.2 CN1.2 P4.2 R5.2 | length 1563.3
  Top Layer w12: P4.2 95,732.6 95,522.44 384.24,522.44 384.24,666.54 542.06,666.54 542.06,538.09 552.4,548.43 629.8,548.43 629.8,374.57 CN1.2
  Bottom Layer w12: P4.2 145.71,775 243.7,775 ; R5.2@259.88,718.43 243.7,734.61 243.7,775 ; C2.2@352.4,771.02 348.42,775 243.7,775
L_AUDIO_OUT: C30.2 CN2.2 U8.6 U8.7 | length 1167.6
  Top Layer w12: CN2.2@3593.7,414.13 3593.7,578.7 v1(3627,612)
  Bottom Layer w12: U8.7 2953.89,472.44 3015,472.44 ; U8.6 3015.75,525 ; 3015.75,472.44 3015.75,522.04 3017.76,520.03 3537,520.03 3537,573.74 ; C30.2 3456.3,574.92 3456.38,575 3528,575 3529.26,573.74 3537,573.74 ; v1(3627,612) 3618.2,603.2 3618.2,580.77 3611.17,573.74 3537,573.74
NetC1_1: C1.1 R3.1 R7.2 | length 383.4
  Bottom Layer w12: R7.2 1242,373 ; R3.1@1305.6,187.8 1242,187.8 1242,373 ; C1.1@1314,373 1242,373
NetC1_2: C1.2 D1.1 D2.2 P5.2 R9.3 U2.6 U2.7 | length 2638.7
  Top Layer w12: R9.3 1159.45,137.01 1514.17,137.01 1514.17,255.33 1512.35,257.15 1512.35,295.07 1513.39,296.11 v1(1513.39,367.32) ; v1(1840,496) 1851.98,496 1854.34,493.64 1818.64,493.64 1818.64,108.39 1859.61,108.39 P5.2
  Bottom Layer w12: U2.7 1153.72,553.44 1152,555.16 1152,577.31 ; U2.6 1153.72,603.44 1152,601.72 1152,577.31 ; C1.2@1384.3,364 C1.2 v1@1513.39,367.9 ; 1431,371.01 1431,406.15 1423.88,413.27 1346.71,413.27 1328.09,431.89 1130,431.89 1130,577.31 1152,577.31 ; D2.2 1587.94,367.9 1530,367.9 1530,423 1729.31,423 1745,438.69 1745,500 ; D1.1@1689.21,500 1745,500 ; v1(1840,496) 1826.75,496 1822.88,492.12 1815,500 1745,500 ; P5.2@1900,50.69 P5.2
NetC2_1: C2.1 R4.2 | length 102.2
  Bottom Layer w12: C2.1@424.8,771.02 C2.1 523.58,771.02 R4.2@526,768.6
NetC4_2: C4.2 C5.1 D3.2 R8.1 R10.1 | length 769.3
  Bottom Layer w12: C4.2@424.4,567 C4.2 477,567 ; R8.1 477,567 ; D3.2 536.7,666 486.94,666 477,656.06 477,567 ; R10.1 565.57,303.21 448.54,303.21 448.54,388.97 455.56,396 461,396 472.92,407.92 477,407.92 ; C5.1 486.37,398.54 477,407.92 ; 477,407.92 477,567
NetC6_1: C6.1 R11.1 R15.2 | length 243
  Bottom Layer w8: R15.2 R15.2@1222.13,940.73
  Bottom Layer w12: R15.2@1222.13,940.73 1262.35,940.73 ; R11.1 1267.04,828.25 1262.35,832.94 1262.35,940.73 ; C6.1@1307.84,940.73 1262.35,940.73
NetC6_2: C6.2 D4.1 D5.2 P8.2 R17.3 U3.6 U3.7 | length 2571.2
  Top Layer w12: R17.3 1262.2,275.2 1365.35,378.35 v1(1365.35,458.27) ; v1(1479.53,464.57) 1505.34,464.57 1514,473.23 1514,1141 v1(1512,1143)
  Bottom Layer w12: U3.7 1319,1094 1319,1144 ; U3.6 1319,1144 ; 1322,1141 1319,1144 ; v1(1365.35,458.27) 1371.65,464.57 v1(1479.53,464.57) ; C6.2 1521,939 ; D5.2@1587.56,939 1521,939 ; D4.1@1689.21,1045 1729.46,1045 1737.23,1052.77 ; P8.2 1689.21,1145 1687.21,1143 ; 1319,1144 1511,1144 v1(1512,1143) 1687.21,1143 ; 1521,939 1521,981 1530,990 1730.2,990 1737.23,997.03 1737.23,1052.77 ; 1687.21,1143 1737.23,1143 1737.23,1052.77
NetC7_1: C7.1 R12.2 | length 108.9
  Bottom Layer w12: C7.1@428.74,1265 R12.2@537.6,1265
NetC9_2: C9.2 C10.1 D6.2 R16.1 R18.1 | length 534.4
  Bottom Layer w12: C9.2@431.14,1034.22 C9.2 480.69,1034.22 ; 485.37,1061.22 D6.2@537.6,1061.22 ; 488.91,970.49 C10.1@538.98,970.49 ; R18.1@527.24,869.91 524.47,877.18 488.91,877.18 480.69,885.4 480.69,1034.22 ; R16.1 487.72,1160.22 480.69,1153.19 480.69,1034.22
NetC11_1: C11.1 U4.1 | length 1364.8
  Top Layer w12: v1(2205,189) v1(2205,405)
  Bottom Layer w12: 2045,405 v1(2205,405) ; 2045,407.46 2045,515.53 2052.03,522.56 U4.1@2118.74,522.56 ; v1(2205,189) 2590.81,189 2605.22,174.59 2975.41,174.59 C11.1@2995,155
NetC12_1: C12.1 C14.1 U4.3 | length 620.8
  Bottom Layer w12: C14.1 1709.69,603 ; 1668.38,708.72 C12.1 1711.97,708.72 1719,701.69 1719,612.31 1709.69,603 ; U4.3 1946.26,573.74 1917,603 1709.69,603
NetC13_1: C13.1 U4.2 | length 1693.2
  Top Layer w12: v1(1894.48,157.48) 1900.85,163.85 1900.85,510.77 1894.48,517.14 1894.48,544.48 v1(1899,549)
  Bottom Layer w12: C13.1@845,164.37 845,164 917.36,164 950.25,131.1 1868.1,131.1 v1(1894.48,157.48) ; v1(1899,549) 1899.43,548.57 2118.32,548.57 U4.2
NetC15_1: C15.1 C16.1 R19.2 U4.4 | length 687.3
  Top Layer w12: v1(1980,486) v1(1980,621)
  Bottom Layer w12: C16.1@1952,270 2008.97,270 2016,277.03 2016,323 ; C15.1@1959,369 2015.3,369 ; v1(1980,486) 1980,461 2015.7,425.3 2015.7,368 ; v1(1980,621) 2034,621 2055.67,599.33 U4.4 ; R19.2@2072.6,323 2016,323 ; 2015.7,368 2016,368 ; 2015.7,368 2016,368.3 2016,368 ; 2016,323 2016,368
NetC21_1: C21.1 U5.15 | length 224.5
  Bottom Layer w12: U5.15 3428.78,910.15 3445.09,893.83 3445.09,826.31 3461.41,810 C21.1@3471.07,810
NetC22_1: C22.1 U5.14 | length 175.8
  Bottom Layer w12: U5.14 3447.36,935.15 3455.51,927 C22.1@3500,927
NetC23_1: C23.1 U5.13 | length 224.4
  Bottom Layer w12: U5.13 3428.15,960.15 3435,967 3435,1005 3456,1026 3494.03,1026 C23.1@3500,1020.03
NetC26_1: C26.1 C28.1 pad.1 U6.1 U7.1 | length 3066
  Top Layer w12: v1@3605.51,1914.16 v1(3605.51,1914.96)
  Top Layer w15: v1(3605.51,1914.96) pad.1@3759.09,1914.96
  Top Layer w25: v1(3222.44,3083.07) 3222.44,3268.7 U7.1@3224.02,3270.28 ; v1(3247.04,2341.94) 3249.8,2341.94 U6.1 ; C28.1@3422,2945 C28.1 3422,3030 3585.83,3030 ; C26.1 v1(3585.83,2249.21) 3585.83,3030 ; v1(3755.91,3041.73) 3744.17,3030 3585.83,3030
  Bottom Layer w25: v1(3222.44,3083.07) 3714.57,3083.07 v1(3755.91,3041.73) ; v1(3247.04,2341.94) 3586.03,2341.94 3585.83,2341.73 v1(3585.83,2249.21) 3562.2,2225.59 3562.2,1960.24 3602.2,1920.24 v1@3610.24,1920.24
NetC30_1: C30.1 R25.1 R26.2 | length 266.1
  Bottom Layer w12: R25.1 3335,682.01 ; R26.2 3335,682.01 ; C30.1 3378.82,580 3335,580 3335,682.01
NetC32_1: C32.1 R27.2 R28.1 | length 262.4
  Bottom Layer w12: R28.1 3028.31,260 ; R27.2 3023.62,357.05 3023.62,264.69 3028.31,260 ; C32.1 3081.73,260 3028.31,260
NetC33_1: C33.1 R28.2 U8.3 | length 463.2
  Bottom Layer w12: U8.3 2837.97,525 2845,517.97 2845,257.05 ; C33.1 2845,257.05 ; R28.2@2902.6,257.05 2845,257.05
NetP3_2: P3.2 R6.2 R7.1 U2.1 | length 559.6
  Bottom Layer w12: P3.2 1059.2,287.01 1060.78,288.58 1060.78,373 ; R6.2 1060.78,373 ; U2.1@1022.64,505.16 941.16,505.16 932,496 932,449.21 942.53,438.69 1053.75,438.69 1060.78,431.66 1060.78,373 ; R7.1@1104.6,364 R7.1@1106.06,364 ; R7.1 1060.78,373
NetP6_2: P6.2 R14.2 R15.1 U3.1 | length 592.7
  Bottom Layer w12: 1008.39,809 1008.39,854 1088,854 1098,864 1098,939 ; U3.1@1036,1049 1031.31,1044.31 973,1044.31 973,1006.05 980.05,999 1093.31,999 1098,994.31 1098,939 ; R14.2@1051.5,939 1098,939 ; R15.1@1142.06,939 1098,939
NetR4_1: R4.1 R6.1 U2.2 | length 845.6
  Top Layer w12: v1(792,785) 792,616.44 v1(855,553.44)
  Bottom Layer w12: R4.1 616.39,771.02 630.37,785 v1(792,785) ; v1(855,553.44) 891,553.44 ; R6.1@939.6,364 932.57,371.03 891,371.03 891,553.44 ; U2.2@1022.64,555.16 1020.92,553.44 891,553.44
NetR10_2: R10.2 U2.3 | length 684.6
  Bottom Layer w12: R10.2 800,296.18 800,578.15 800.43,578.58 800.43,605.58 1022.22,605.58 U2.3@1022.64,605.16
NetR12_1: R12.1 R14.1 U3.2 | length 916.4
  Top Layer w12: v1(800,940.73) 800.5,941.23 800.5,1091 v1(801,1091.5) v1(801,1260)
  Bottom Layer w12: R12.1@611.88,1263.52 612.4,1263.52 615.92,1260 v1(801,1260) ; v1(800,940.73) 973.87,940.73 R14.1 ; v1(801,1091.5) 802.5,1093 802.75,1092.75 1029.75,1092.75 U3.2@1030,1093
NetR18_2: R18.2 U3.3 | length 708.1
  Top Layer w12: v1(917.36,877.18) v1(917.36,1144)
  Bottom Layer w12: R18.2@606.4,857 R18.2@612.4,863 ; R18.2@607.4,873 913.17,873 v1(917.36,877.18) ; v1(917.36,1144) 919.36,1142 1032,1142 1033,1141 U3.3
NetR20_2: R20.2 U5.5 | length 284.7
  Bottom Layer w12: R20.2 3018.31,872 3023.31,877 3023.31,954.31 3054.15,985.15 U5.5
NetR21_2: R21.2 U5.6 | length 220.4
  Bottom Layer w12: R21.2 2998.31,967 3041.46,1010.15 U5.6 U5.6@3124.96,1010.15
NetR22_2: R22.2 U5.7 | length 203.8
  Bottom Layer w12: R22.2 3008.15,1062 3035,1035.15 U5.7
NetR23_2: R23.2 U5.8 | length 254.6
  Bottom Layer w12: R23.2 2987,1163 3023.31,1126.7 3023.31,1091.84 3055,1060.15 U5.8
PCM1781-BCK: DAC_OUT.3 R22.1 U1.52 | length 3750
  Top Layer w12: v1(1598.43,2440.94) 1600,2439.37 DAC_OUT.3@1600,2141.73 ; v1(2718.5,1060.15) 2718.5,1353.84 2923.62,1558.96 v1(2923.62,2720.08)
  Bottom Layer w12: v1(1598.43,2440.94) 1619.2,2420.17 2536.76,2420.17 2600,2483.41 U1.52 2600,2683.86 2636.22,2720.08 v1(2923.62,2720.08) ; v1(2718.5,1060.15) 2845.67,1060.15 R22.1
"PCM1781-I2SRX DATA": DAC_OUT.1 R21.1 U1.27 | length 2691
  Top Layer w12: DAC_OUT.1@1400,2141.73 1400,2053.2 1425.2,2028 1846.02,2028 2153.54,1720.47 2779.53,1720.47 2800,1700 U1.27 U1.27@2790.82,1638.82 ; v1@2669,960.15 2669,1439 2680,1450 v1(2680,1510)
  Bottom Layer w12: v1(2669,952) 2742.33,952 2757.33,967 R21.1 R21.1@2847.6,970.94 ; v1(2680,1510) 2782.97,1510 2800,1527.03 U1.27
"PCM1781-I2SRX WS": DAC_OUT.4 R23.1 U1.53 | length 3334.6
  Top Layer w12: v2(1696.85,2368.91) 1696.85,2332.95 1699.21,2330.59 DAC_OUT.4 ; v2(2771,1163) 2771,1360 2907,1496 2960,1496 2970,1506 v2(2970,2640)
  Bottom Layer w12: v2(1696.85,2368.91) 1702.76,2363 2535.05,2363 2700,2527.95 U1.53 2700,2610 2730,2640 v2(2970,2640) ; v2(2771,1163) R23.1
PCM1781_SCK: DAC_OUT.2 R20.1 U1.68 | length 3560.8
  Top Layer w12: DAC_OUT.2@1500,2141.73 1500,2078.74 1519.68,2059.06 1976.38,2059.06 2283.46,1751.97 2767.72,1751.97 2795.75,1780 2795.75,1823.75 U1.68 ; v1(3011.81,787.4) v1(3011.81,1202.39) ; v1(3213,1202.39) 3216.5,1205.89 3216.5,1826.5 v1(3220,1830)
  Bottom Layer w12: U1.68 2801,1829 3219,1829 v1(3220,1830) ; R20.1 2800,872 2800,798 2810.6,787.4 v1(3011.81,787.4) ; v1(3011.81,1202.39) v1(3213,1202.39)
PCM1802_BCK: ADC_OUT.3 U1.15 U4.11 | length 2043.5
  Top Layer w12: v1(2490,820) v1@2490,1380
  Bottom Layer w12: ADC_OUT.3 1599.61,1889.37 1599.61,1648.39 U1.15 1600,1457 1657,1400 v1(2470,1400) ; U4.11@2397.19,755.73 U4.11 2472.87,752.87 2490,770 v1(2490,820)
PCM1802_DOUT: ADC_OUT.1 U1.17 U4.12 | length 2174.1
  Top Layer w12: v1(1920,820) v1(1920,1520)
  Bottom Layer w12: ADC_OUT.1 1800,1888.98 U1.17 1800,1540 1820,1520 v1(1920,1520) ; v1(1920,820) 2211.4,820 2291.4,900 2555.91,900 2562.94,892.97 2562.94,757.25 2532.97,727.28 U4.12
PCM1802_LRCK: ADC_OUT.4 U1.16 U4.10 | length 1794.1
  Top Layer w12: v1(1840,750) v1(1840,1450)
  Bottom Layer w12: ADC_OUT.4 1564.45,1955 1647,1955 1649,1953 1649,1734 1700,1683 U1.16 1700,1495 1745,1450 v1(1840,1450) ; v1@1840,752.87 U4.10
PCM1802_SCKL: ADC_OUT.2 U1.57 U4.15 | length 2687.6
  Top Layer w12: v1(2532.97,606.95) 2540,613.98 v1(2540,1510) v1@2540,1512
  Bottom Layer w12: ADC_OUT.2 1699.21,1967.72 1719.69,1988.19 2342.52,1988.19 2350,1980.71 2350,1929.13 ; U4.15 2489.41,650.51 v1(2532.97,606.95) ; v1(2540,1510) 2400,1510 2350,1560 2350,1929.13 ; U1.57 2598,1930 2437.01,1930 2436.14,1929.13 2350,1929.13
R_AUDIO_ADC: C13.2 R17.2 | length 603.1
  Top Layer w12: C13.2 937.8,72.83 1055.51,190.55 1278.35,190.55 R17.2
R_AUDIO_IN: C7.2 CN1.1 CN1.3 P7.2 R13.2 | length 1540.5
  Top Layer w12: P7.2@144.09,1205 70,1205 70,516.33 100.33,486 482.94,486 CN1.3
  Bottom Layer w12: P7.2@145.71,1206.61 153.22,1214.12 153.22,1267 258.9,1267 ; R13.2@258.9,1195.87 258.9,1267 ; C7.2@356.34,1263.52 352.86,1267 258.9,1267
R_AUDIO_OUT: C32.2 CN2.1 CN2.3 U8.1 U8.2 | length 1574.3
  Top Layer w12: v1(2718,342) 2754,306 3329,306 3374,261 3393.31,261 ; v1(3450,261) 3393.31,261 ; CN2.3 3450,411.02 3433.36,394.39 3432.77,394.39 3408.41,370.02 3408.41,369.43 3393.31,354.33 3393.31,261
  Bottom Layer w12: v1(2718,342) 2708.05,342 2690,360.05 2690,425 ; U8.1@2753,425 2690,425 ; U8.2@2753,475 2694.69,475 2690,470.31 2690,425 ; C32.2 3157.89,261 v1(3450,261)
SW1: SW1.2 U1.61 | length 2844.7
  Bottom Layer w12: SW1.2 253.54,2886.35 253.54,2447.24 376.88,2323.91 2595.91,2323.91 U1.61
SW2: SW2.2 U1.60 | length 3612.2
  Bottom Layer w12: SW2.2 129.92,3230.94 129.92,2278 2550,2278 U1.60
SW3: SW3.2 U1.67 | length 1258.3
  Top Layer w12: SW3.2 2660.95,3335.83 2585.04,3335.83 2585.04,2842.13 2753.15,2674.02 2753.15,2522.83 2814.17,2461.81 2814.17,2405.51 2782.66,2374 2770.06,2374 2754,2357.94 2754,2345.34 2736.66,2328 U1.67
SW4: SW4.2 U1.73 | length 656.2
  Top Layer w12: SW4.2 2860.63,2676.77 2860.63,2388.63 U1.73
SW5: SW5.2 U1.72 | length 2704.1
  Top Layer w12: SW5.2 2986.73,3818.9 3020.47,3785.16 v1(3020.47,2244.88)
  Bottom Layer w12: U1.72 3003.59,2228 v1(3020.47,2244.88)
TFT_CS: J1.1 U1.40 | length 1050.9
  Bottom Layer w12: J1.1 903,3126 1400,2629 U1.40
TFT_RD: J2.2 U1.38 | length 1629.9
  Bottom Layer w12: J2.2 1003,3607 973,3637 767,3637 750,3620 750,3064.84 1200,2614.84 U1.38
TFT_RS: J2.1 U1.39 | length 1479
  Bottom Layer w12: J2.1 903,3604 895.43,3611.57 803.57,3611.57 790,3598 790,3086 1300,2576 U1.39
TFT_RST: J1.3 U1.42 | length 1050.9
  Bottom Layer w12: J1.3 1103,3107 1600,2610 U1.42
TFT_WR: J1.2 U1.41 | length 1050.9
  Bottom Layer w12: J1.2 1003,3087 1500,2590 U1.41
pads on no net: CN1.None CN2.None J1.15 J1.16 J2.11 J2.14 J2.15 J2.16 SW1.3 SW1.4 SW2.3 SW2.4 SW3.3 SW3.4 SW4.3 SW4.4 U1.2 U1.3 U1.4 U1.13 U1.14 U1.18 U1.19 U1.20 U1.21 U1.22 U1.23 U1.24 U1.25 U1.26 U1.29 U1.30 U1.31 U1.32 U1.33 U1.34 U1.35 U1.36 U1.37 U1.51 U1.55 U1.56 U1.58 U1.59 U1.62 U1.63 U1.64 U1.65 U1.66 U1.69 U1.70 U1.71 U5.9 U5.10 U5.16 U6.4

## Polygon pours and split planes (outlines as drawn)
DGND on Bottom Layer "Bottom Layer-No Net" (solid, pour order 12): 3015.75,1350.39 3015.75,1259.84 3116.18,1259.84 3120.12,1263.78 3120.12,1342.52
DGND on Bottom Layer "masa digital" (solid, remove dead copper, pour order 40): 3031.5,3892.13 3627.95,3892.13 3627.95,3255.91 3618.5,3246.46 3031.5,3246.46
DGND on Bottom Layer "Bottom Layer-No Net 1" (solid, pour order 44): 3169.29,2736.22 3654.72,2736.22 3654.72,2377.95 3173.23,2377.95 3169.29,2381.89
DGND on Top Layer "masa digital" (solid, remove dead copper, pour order 46): 3842,1506 78.74,1506 78.74,3648.74 340,3910 357,3893 3842,3893
AGND on Top Layer "masa digital" (solid, remove dead copper, pour order 34): 78.74,69.94 78.74,1470.47 3858.27,1470.47 3858.27,66.09

## Silkscreen, mask and mechanical layers (free items; w line width, h text height)
Top Overlay:
  drawing of 18 lines, arcs and shapes, not listed
  text "TFT" at 1318.9,3208.66 h60
  text "DIGITAL EQH-TDII 2019" at 3877.95,2328 h60 r90
  text "DATA" at 826.77,2263.78 h60
  text "SCKI" at 1103,2263.78 h60
  text "BCK" at 1380.4,2263.78 h60
  text "LRCK" at 1633.86,2263.78 h60
  text "LRCK" at 1013.78,1712.6 h60
  text "BCK" at 1338.58,1712.6 h60
  text "SCKI" at 1555.12,1712.6 h60
  text "DATA" at 1803,1712.6 h60
  text "LPC1769" at 216.54,1456.69 h60
  text "LINE IN" at 255.91,438.55 h60 r90
  text "LINE OUT" at 3755.91,196.85 h60 r90
Bottom Overlay:
  lines w10: 649.61,531.5 649.61,549 ; 1446.06,1839.76 1463.57,1839.76 ; 3303.73,105 3303.73,42.72 3307.09,39.37
Mechanical 1:
  circle w10: c3818.9,118.11 r106.01
  circle w10: c3818.9,3818.9 r106.01
  circle w10: c118.11,3818.9 r106.01
  circle w10: c118.11,114.67 r106.01
  lines w4.92: 0,954.25 0,2922.76 ; 0,984.25 0,0 0,3907.01 ; 0,3937.01 3916.54,3937.01 ; 3937.01,0 3937.01,3916.54 ; 3937.01,984.25 3937.01,2952.76
  lines w5: 0,0 3937.01,0
Mechanical 4:
  circle w3.94: c3767.64,1915.24 r1.97
  circle w3.94: c3767.64,1915.24 r1.97
  lines w5: 3756.81,2114.06 3756.81,1813.78 3756.81,2147.64
Mechanical 16:
  lines w1.97: 3670.35,1046.54 3670.35,1312.28 ; 3724.33,1799.09 3724.33,2133.74 ; 3809.33,1445.75 3809.33,1711.5